# Altium PCB Backlight_V3.PcbDoc
Units mm, origin at the board's own origin, x right, y up, seen from the top; angles counter-clockwise.
Board outline 175 x 175 mm, 2 copper layers (Top Layer, Bottom Layer); 98 components, 59 nets, 200 pads, 33 vias.
Unrouted connection lines stored in the file: 1.
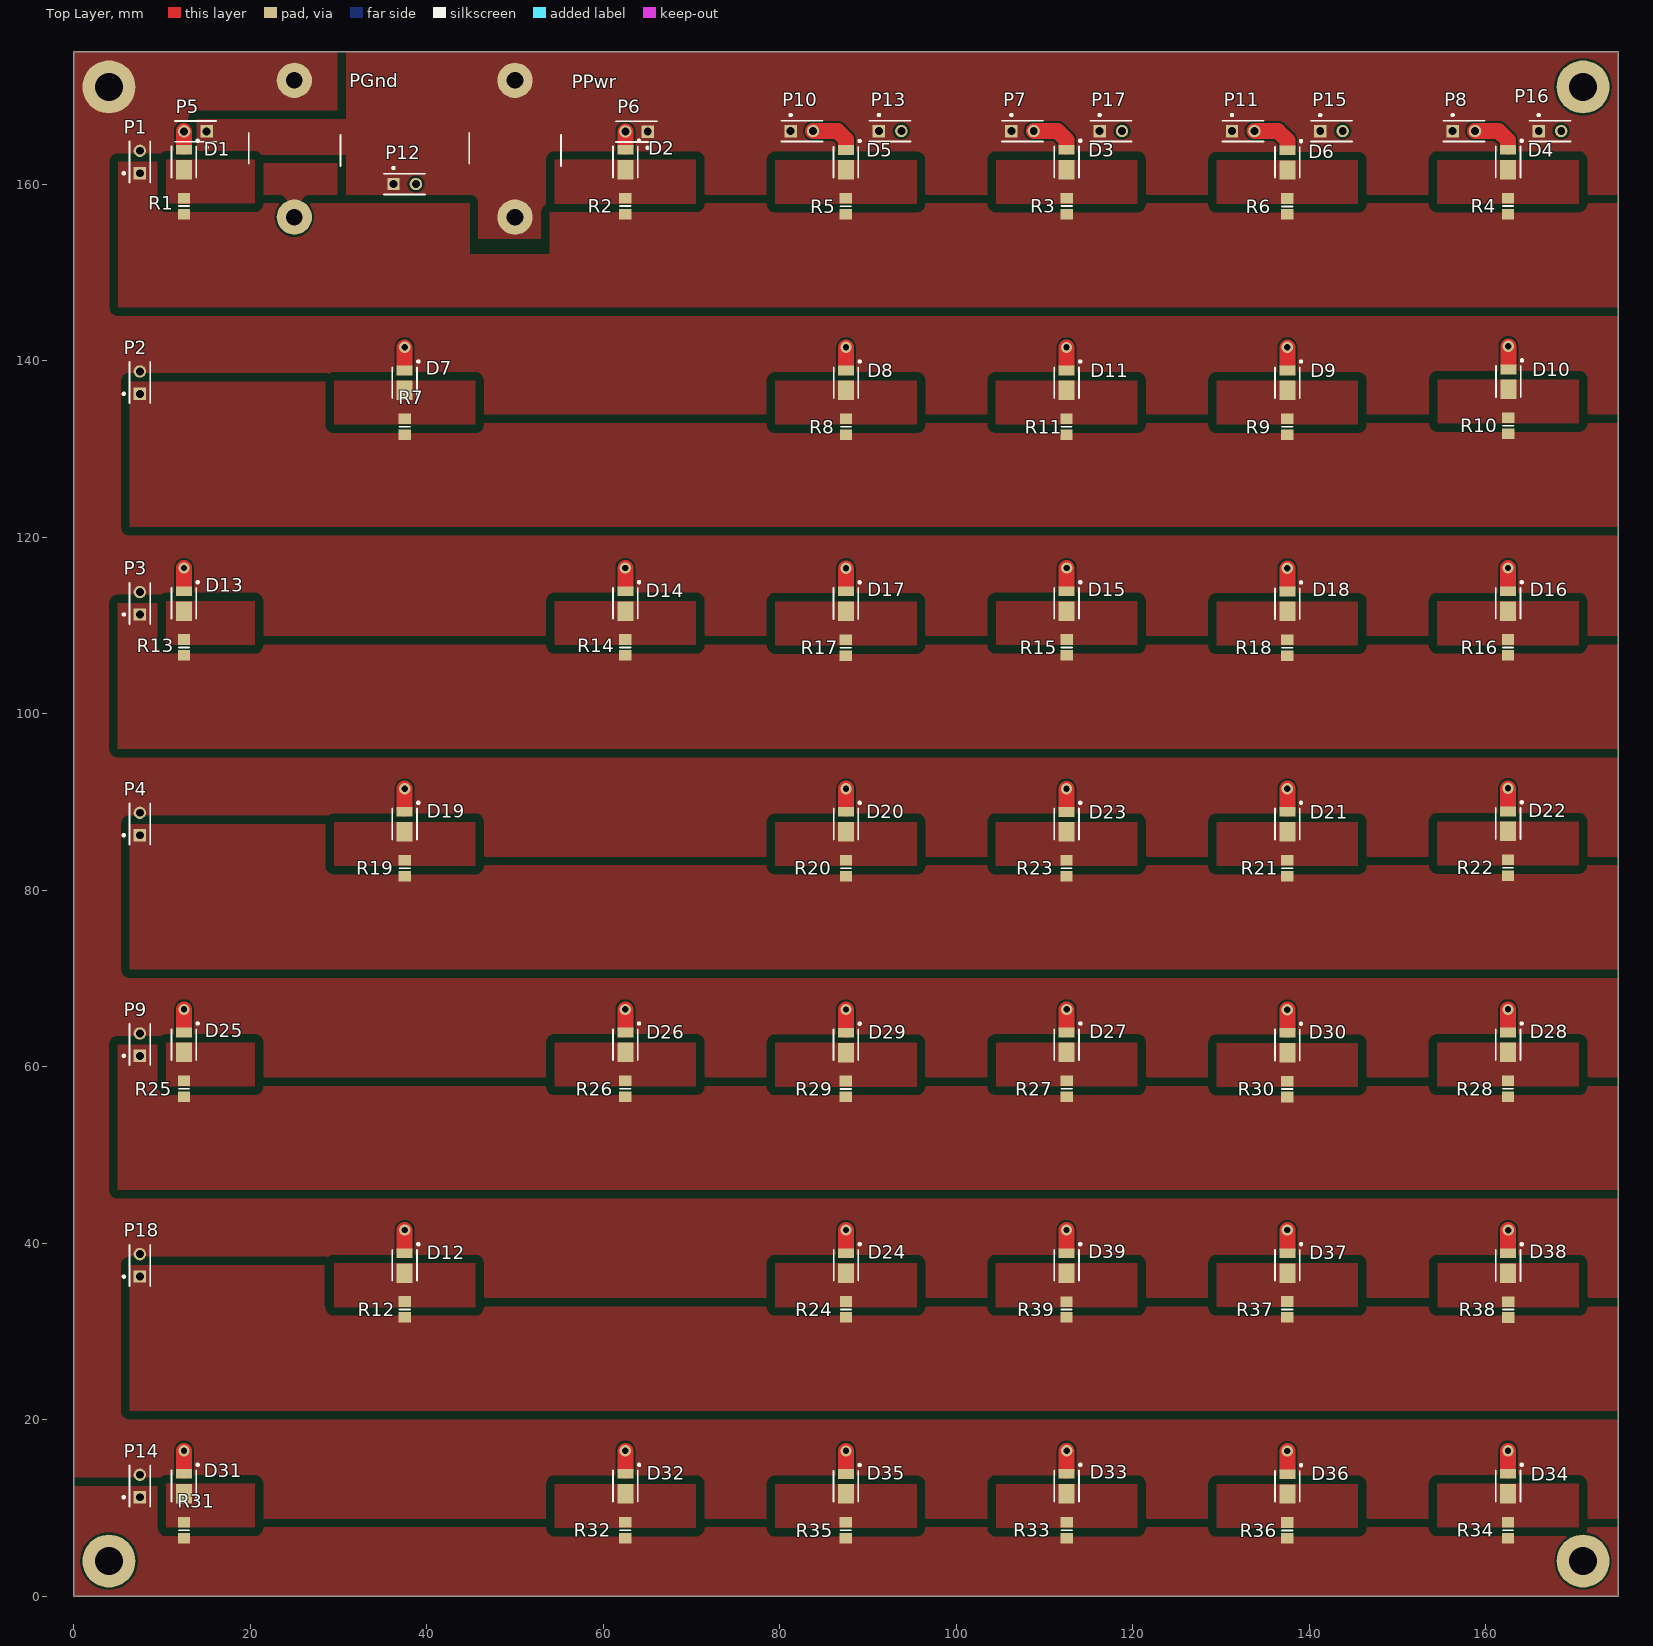
[diagram p0: Top Layer view]
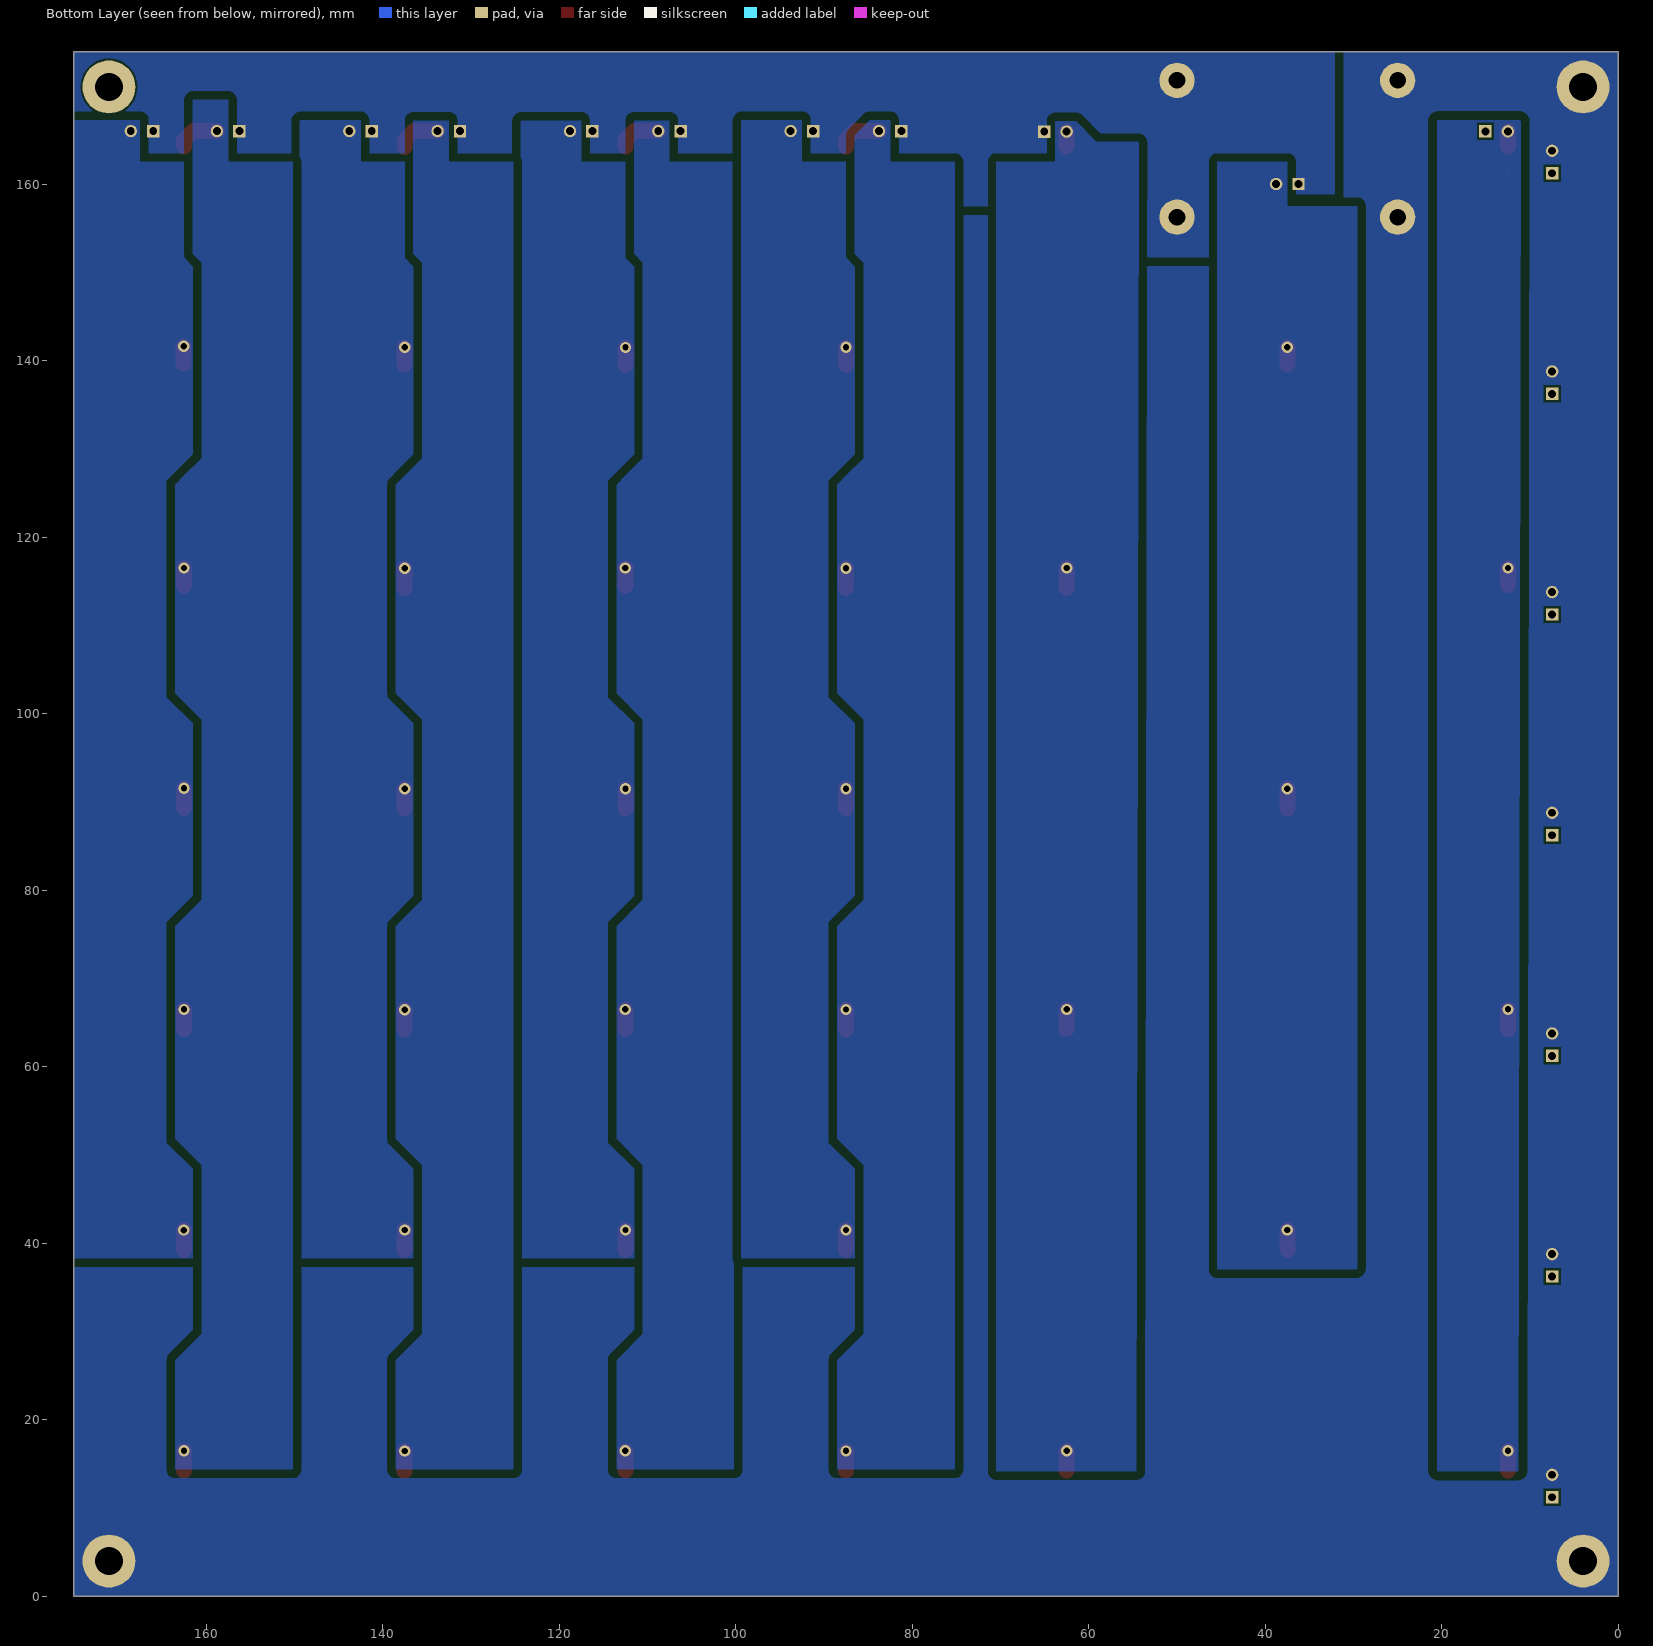
[diagram p1: Bottom Layer view, seen from below]
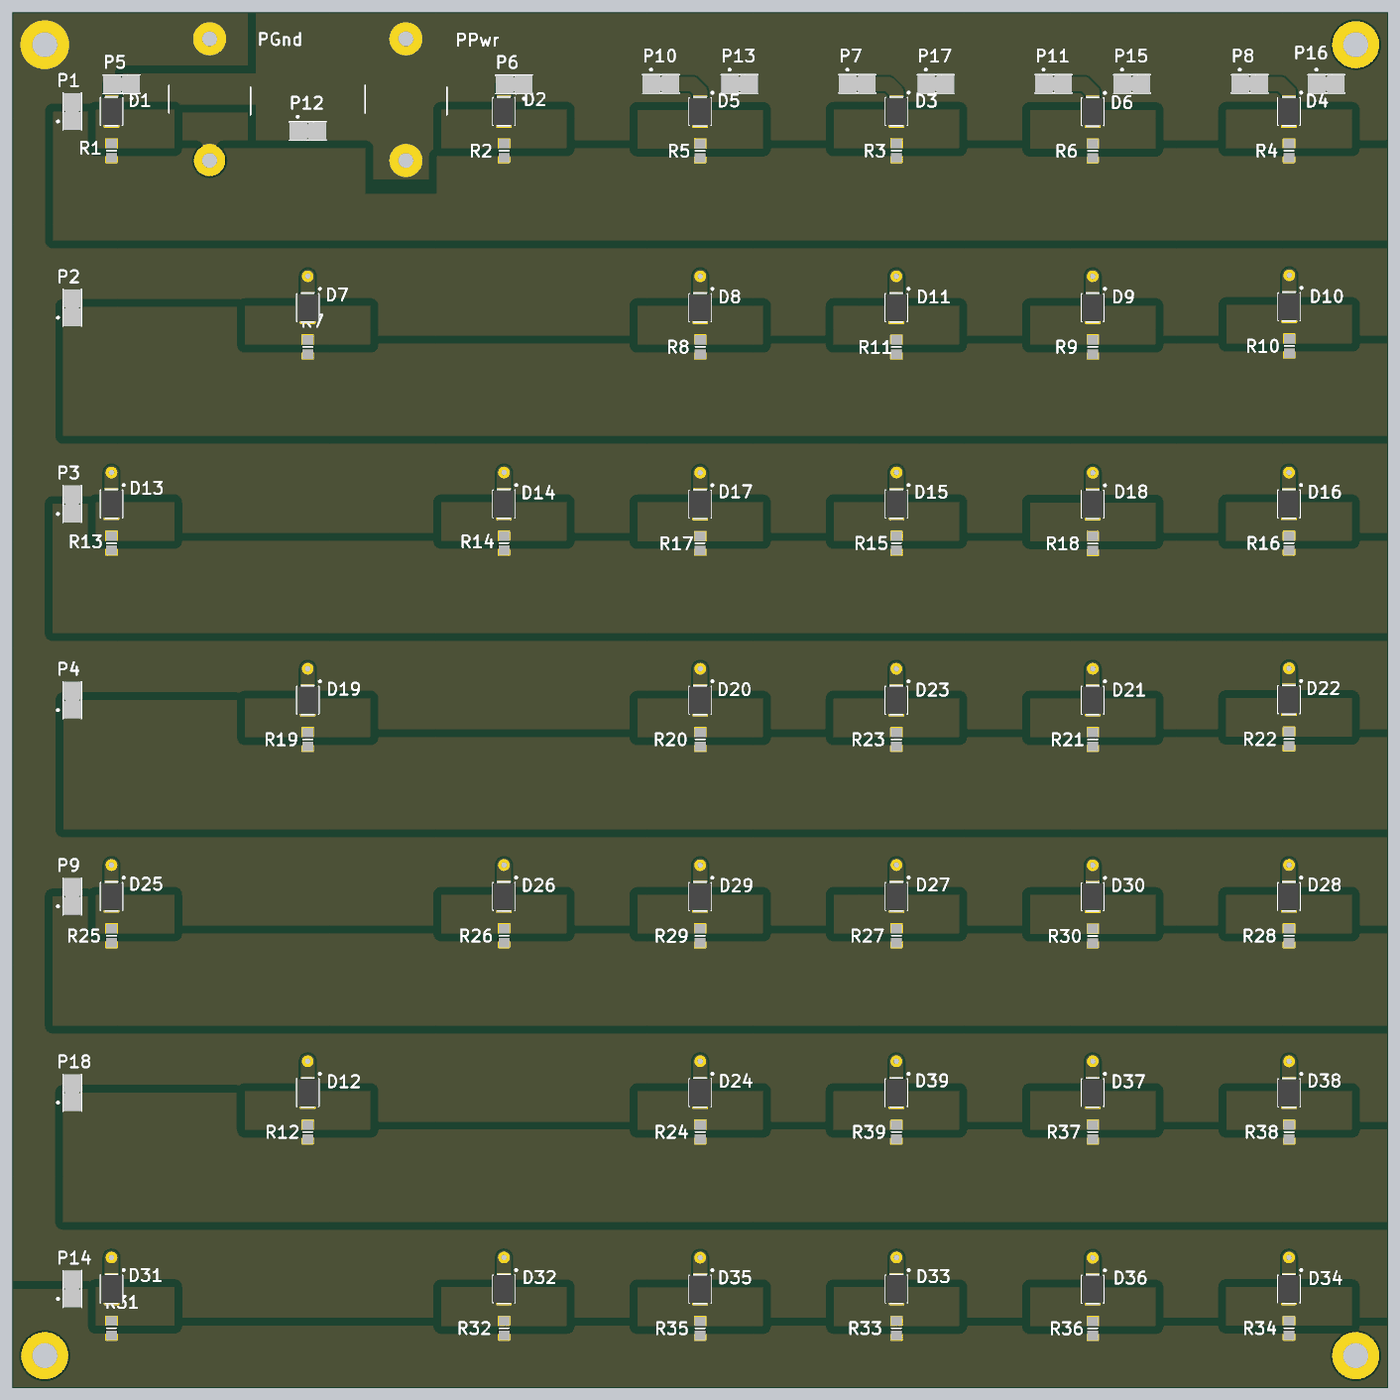
[diagram p2: 3D render of the assembled board from above, using the file's embedded part models]

## Layer stack, top to bottom
Top Solder: solder mask 0.0102, Solder Resist, Dk 3.5
Top Layer: signal copper 0.0356
Dielectric 1: dielectric 0.32, FR-4, Dk 4.8
Bottom Layer: signal copper 0.0356
Bottom Solder: solder mask 0.0102, Solder Resist, Dk 3.5

## Board outline
0,0 0,175 175,175 175,0

## Design rules (kind name [scope] priority, off if disabled: settings)
Clearance [All] p1: gap=0.254 ignorepadtopadclearanceinfootprint=FALSE except(0: Arc-Hole Track-Hole SMDPad-Hole THPad-Hole Via-Hole Fill-Hole Poly-Hole Region-Hole Text-Hole; 1: Fill-Fill Fill-Poly Fill-Region Poly-Poly Poly-Region Region-Region)
PolygonConnect [All] p1: connectstyle=Direct reliefconductorwidth=0.254 reliefentries=4 polygonreliefangle="90 Angle" airgapwidth=0.254
RoomDefinition Backlight_V2 [InComponentClass('Backlight_V2')] p1: confinementstyle=ConfineIn formatcopy=TRUE lockcomponents=FALSE outline 0,0 175,0 175,177.979 0,177.979
RoutingVias [All] p1: holewidth=0.711 width=1.27 viastyle="Through Hole" minholewidth=0.711 minwidth=1.27 maxholewidth=0.711 maxwidth=1.27
SolderMaskExpansion [All] p1: expansion=0.102 istentingtop=FALSE
Width [All] p1: maxlimit=10 minlimit=0.1 preferedwidth=1.8
30 further rules are at their usual default settings.

## Components (designator, comment, footprint, x,y, rotation, side; value= is the part's Value field where it differs from the comment)
D1 "LED0" DIOM3528X07N 12.5,162.5 r270 top
D2 "LED0" DIOM3528X07N 62.5,162.5 r270 top
D3 "LED0" DIOM3528X07N 112.5,162.5 r270 top
D4 "LED0" DIOM3528X07N 162.5,162.5 r270 top
D5 "LED0" DIOM3528X07N 87.491,162.479 r270 top
D6 "LED0" DIOM3528X07N 137.499,162.466 r270 top
D7 "LED0" DIOM3528X07N 37.5,137.5 r270 top
D8 "LED0" DIOM3528X07N 87.5,137.5 r270 top
D9 "LED0" DIOM3528X07N 137.5,137.5 r270 top
D10 "LED0" DIOM3528X07N 162.534,137.627 r270 top
D11 "LED0" DIOM3528X07N 112.484,137.496 r270 top
D12 "LED0" DIOM3528X07N 37.5,37.5 r270 top
D13 "LED0" DIOM3528X07N 12.5,112.5 r270 top
D14 "LED0" DIOM3528X07N 62.5,112.5 r270 top
D15 "LED0" DIOM3528X07N 112.5,112.5 r270 top
D16 "LED0" DIOM3528X07N 162.5,112.5 r270 top
D17 "LED0" DIOM3528X07N 87.491,112.479 r270 top
D18 "LED0" DIOM3528X07N 137.499,112.466 r270 top
D19 "LED0" DIOM3528X07N 37.5,87.5 r270 top
D20 "LED0" DIOM3528X07N 87.5,87.5 r270 top
D21 "LED0" DIOM3528X07N 137.5,87.5 r270 top
D22 "LED0" DIOM3528X07N 162.5,87.551 r270 top
D23 "LED0" DIOM3528X07N 112.484,87.496 r270 top
D24 "LED0" DIOM3528X07N 87.5,37.5 r270 top
D25 "LED0" DIOM3528X07N 12.5,62.5 r270 top
D26 "LED0" DIOM3528X07N 62.5,62.5 r270 top
D27 "LED0" DIOM3528X07N 112.5,62.5 r270 top
D28 "LED0" DIOM3528X07N 162.5,62.5 r270 top
D29 "LED0" DIOM3528X07N 87.491,62.479 r270 top
D30 "LED0" DIOM3528X07N 137.499,62.466 r270 top
D31 "LED0" DIOM3528X07N 12.5,12.5 r270 top
D32 "LED0" DIOM3528X07N 62.5,12.5 r270 top
D33 "LED0" DIOM3528X07N 112.5,12.5 r270 top
D34 "LED0" DIOM3528X07N 162.5,12.5 r270 top
D35 "LED0" DIOM3528X07N 87.491,12.479 r270 top
D36 "LED0" DIOM3528X07N 137.499,12.466 r270 top
D37 "LED0" DIOM3528X07N 137.5,37.5 r270 top
D38 "LED0" DIOM3528X07N 162.516,37.49 r270 top
D39 "LED0" DIOM3528X07N 112.484,37.496 r270 top
P1 "5-146280-2" TECO-5-146280-2_V 7.5,162.5 r90 top
P2 "5-146280-2" TECO-5-146280-2_V 7.5,137.5 r90 top
P3 "5-146280-2" TECO-5-146280-2_V 7.5,112.5 r90 top
P4 "5-146280-2" TECO-5-146280-2_V 7.5,87.5 r90 top
P5 "5-146280-2" TECO-5-146280-2_V 13.789,165.973 r180 top
P6 "5-146280-2" TECO-5-146280-2_V 63.77,165.943 r180 top
P7 "5-146280-2" TECO-5-146280-2_V 107.5,166 r0 top
P8 "5-146280-2" TECO-5-146280-2_V 157.5,166 r0 top
P9 "5-146280-2" TECO-5-146280-2_V 7.5,62.5 r90 top
P10 "5-146280-2" TECO-5-146280-2_V 82.5,166 r0 top
P11 "5-146280-2" TECO-5-146280-2_V 132.5,166 r0 top
P12 "5-146280-2" TECO-5-146280-2_V 37.5,160 r0 top
P13 "5-146280-2" TECO-5-146280-2_V 92.5,166 r0 top
P14 "5-146280-2" TECO-5-146280-2_V 7.5,12.5 r90 top
P15 "5-146280-2" TECO-5-146280-2_V 142.5,166 r0 top
P16 "5-146280-2" TECO-5-146280-2_V 167.254,166 r0 top
P17 "5-146280-2" TECO-5-146280-2_V 117.5,166 r0 top
P18 "5-146280-2" TECO-5-146280-2_V 7.5,37.5 r90 top
PGnd "Plug" Bananenbuchse 25,164 r90 top
PPwr "Plug" Bananenbuchse 50,164 r90 top
R1 "Res2" 6-0805_N 12.5,157.5 r90 top value=100
R2 "Res2" 6-0805_N 62.5,157.5 r90 top value=100
R3 "Res2" 6-0805_N 112.5,157.5 r90 top value=100
R4 "Res2" 6-0805_N 162.5,157.5 r90 top value=100
R5 "Res2" 6-0805_N 87.491,157.479 r90 top value=100
R6 "Res2" 6-0805_N 137.499,157.466 r90 top value=100
R7 "Res2" 6-0805_N 37.5,132.5 r90 top value=100
R8 "Res2" 6-0805_N 87.5,132.5 r90 top value=100
R9 "Res2" 6-0805_N 137.5,132.5 r90 top value=100
R10 "Res2" 6-0805_N 162.534,132.627 r90 top value=100
R11 "Res2" 6-0805_N 112.484,132.496 r90 top value=100
R12 "Res2" 6-0805_N 37.5,32.5 r90 top value=100
R13 "Res2" 6-0805_N 12.5,107.5 r90 top value=100
R14 "Res2" 6-0805_N 62.5,107.5 r90 top value=100
R15 "Res2" 6-0805_N 112.5,107.5 r90 top value=100
R16 "Res2" 6-0805_N 162.5,107.5 r90 top value=100
R17 "Res2" 6-0805_N 87.491,107.479 r90 top value=100
R18 "Res2" 6-0805_N 137.499,107.466 r90 top value=100
R19 "Res2" 6-0805_N 37.5,82.5 r90 top value=100
R20 "Res2" 6-0805_N 87.5,82.5 r90 top value=100
R21 "Res2" 6-0805_N 137.5,82.5 r90 top value=100
R22 "Res2" 6-0805_N 162.5,82.551 r90 top value=100
R23 "Res2" 6-0805_N 112.484,82.496 r90 top value=100
R24 "Res2" 6-0805_N 87.5,32.5 r90 top value=100
R25 "Res2" 6-0805_N 12.5,57.5 r90 top value=100
R26 "Res2" 6-0805_N 62.5,57.5 r90 top value=100
R27 "Res2" 6-0805_N 112.5,57.5 r90 top value=100
R28 "Res2" 6-0805_N 162.5,57.5 r90 top value=100
R29 "Res2" 6-0805_N 87.491,57.479 r90 top value=100
R30 "Res2" 6-0805_N 137.499,57.466 r90 top value=100
R31 "Res2" 6-0805_N 12.5,7.5 r90 top value=100
R32 "Res2" 6-0805_N 62.5,7.5 r90 top value=100
R33 "Res2" 6-0805_N 112.5,7.5 r90 top value=100
R34 "Res2" 6-0805_N 162.5,7.5 r90 top value=100
R35 "Res2" 6-0805_N 87.491,7.479 r90 top value=100
R36 "Res2" 6-0805_N 137.499,7.466 r90 top value=100
R37 "Res2" 6-0805_N 137.5,32.5 r90 top value=100
R38 "Res2" 6-0805_N 162.516,32.49 r90 top value=100
R39 "Res2" 6-0805_N 112.484,32.496 r90 top value=100

## Footprints (in the part's own frame and the unit in brackets; to place one, negate y for a bottom-side part, rotate by r counter-clockwise, add the part's x,y. Pads: shape width x height; smd on the part's side, far side on the other; paste and mask are expansions set on the pad)
6-0805_N [mm] "Chip Resistor, Body 2.0x1.2mm, IPC Medium Density"
  rect 1.2x1.4 smd: 1(-0.9,0) 2(0.9,0)
  silkscreen extent 0,-0.6 0,0.6, body extent -1.07,-0.7 1.07,0.7, height 0.7
Bananenbuchse [mm]
  round 4 hole 1.9: 1(-7.75,0) 1(7.75,0)
  silkscreen extent -1.95,-5.23 1.83,5.18, body extent -11.4,-5.42 12.62,5.42, height 12.6
DIOM3528X07N [mm] "Molded Diode, 2-Leads, Body 3.50x2.80mm, IPC Medium Density"
  rect 1.1x1.8 smd: 1(-1.375,0)
  rect 2.2x1.8 smd: 2(0.875,0)
  silkscreen extent -2.52,-1.4 1.75,1.68, body extent -1.97,-1.4 1.97,1.4, height 0.7
TECO-5-146280-2_V [mm] "Connector, 2-Leads, Body 4.67x2.34mm, Pitch 2.54mm"
  rect 1.4x1.4 hole 0.89: 1(-1.27,0)
  round 1.4 hole 0.89: 2(1.27,0)
  silkscreen extent -2.33,-1.17 2.33,1.94, body extent -2.34,-1.17 2.34,1.17, height 5.33

## Part data
D1 D2 D3 D4 D5 D6 D7 D8 D9 D10 D11 D12 D13 D14 D15 D16 D17 D18 D19 D20 D21 D22 D23 D24 D25 D26 D27 D28 D29 D30 D31 D32 D33 D34 D35 D36 D37 D38 D39: "Typical INFRARED GaAs LED", LatestRevisionDate=08-Jul-2005, LatestRevisionNote="Mech Layer 1 removed.", PackageDescription="LED; 2 Leads", PackageReference=LED-0, Published=8-Jun-2000, Publisher="Altium Limited"
P1 P2 P3 P4 P5 P6 P7 P8 P9 P10 P11 P12 P13 P14 P15 P16 P17 P18: library part CMP-2000-07492-1, "Male Header, Pitch 2.54 mm, 1 x 2 Position, Height 8.21 mm, Tail Length 3.05 mm, -65 to 105 degC, RoHS, Bulk", Case\/Package=100, Colour=Black, Current Rating=3A, Flammability Rating=UL94V-0, High Temperature Housing=Yes, Manufacturer="TE Connectivity", Max Current Rating=5A, Max Operating Temperature=105degC, Min Operating Temperature=-65degC, Package Description="Male Header, Pitch 2.54 mm, 1 x 2 Position, Height 8.21 mm, Tail Length 3.05 mm", Package Quantity=500, Approvals=CSA, Board Standoff=No(Without), Connector Type=Header, Contact Gender=Male, Contact Material=CopperAlloy, Contact Mating Length=0.23inch, Contact Plating=Matte, Contact Protection=No(Without), Contact Shape=Square, Datasheet URL=http://www.te.com/commerce/DocumentDelivery/DDEController?Action=showdoc&DocId=Customer+Drawing%7F146280%7FH1%7Fpdf%7FEnglish%7FENG_CD_146280_H1.pdf%7F5-146280-2, Datasheet Version="Rev. H1, 08/2016", Depth=2.34mm, Gasket=No(Without), High Speed Serial Data Connector=No, Housing Colour=Black, Housing Material=Polymer, Keyed=No, Length=4.67mm, Manufacturer URL=http://www.te.com/, Mating Alignment=No(Without), Mating Connector Lock=No(Without), Mating Post Length=0.23inch, Mount=ThroughHole, Mounting Technology=ThroughHole, Number of Contacts=2, Number of Positions=2, Number of Rows=1, Orientation=Straight, Package Reference=5-146280-2, Packaging=Carton, Panel Mount Retention=No(Without), PCB Mount Retention=Without, PCB Mounting Orientation=Vertical, PCB Thickness=0.063inch, Pitch=2.54mm, Radiation Hardening=No, RoHSCompliant=true, Row Spacing=2.54mm, Selectively Loaded=No(Without), Stabilizers=No(Without), Termination=ThroughHole, Termination Post Length=0.12inch
R1 R2 R3 R4 R5 R6 R7 R8 R9 R10 R11 R12 R13 R14 R15 R16 R17 R18 R19 R20 R21 R22 R23 R24 R25 R26 R27 R28 R29 R30 R31 R32 R33 R34 R35 R36 R37 R38 R39: "Resistor", LatestRevisionDate=17-Jul-2002, LatestRevisionNote="Re-released for DXP Platform.", PackageDescription="Axial Device, Thru-Hole; 2 Leads; 0.4 in Pin Spacing", PackageReference=AXIAL-0.4, Published=8-Jun-2000, Publisher="Altium Limited"
PGnd PPwr: LatestRevisionDate=17-Jul-2002, LatestRevisionNote="Re-released for DXP Platform.", Publisher="Altium Limited"

## Free pads (board coordinates)
  round 6 hole 3.2: 1(4,4) 1(4,171) 1(171,4) 1(171,171)

## Via types
v1: diameter 1.27, hole 0.711, Top Layer to Bottom Layer, 33 vias

## Nets (pads, with @x,y where several pads share a name; then routed paths per layer and width w, separated by ;. In a path a pad name is that pad's centre, name@x,y a point inside that pad or via, vN(x,y) a via of type N, cw(c..) or ccw(c..) an arc to the next point about the centre after c; other vN are vias at no path point)
GND: P1.2 P2.2 P3.2 P4.2 P9.2 P14.2 P18.2 pad.1 PGnd.1
Hex1: D7.1 D12.1 D19.1 P12.2 | length 6.5
  Top Layer w1.8: D12.1@37.5,39.25 v1(37.5,41.5) ; D19.1@37.5,89.25 v1(37.5,91.5) ; 37.5,139.527 v1(37.5,141.5)
Hex2: D8.1 D20.1 D24.1 P13.2 | length 6.5
  Top Layer w1.8: D24.1@87.5,39.25 v1(87.5,41.5) ; D20.1@87.5,89.25 v1(87.5,91.5) ; 87.5,139.516 v1(87.5,141.5)
Hex3: D9.1 D21.1 D37.1 P15.2 | length 6.5
  Top Layer w1.8: D37.1@137.5,39.25 v1(137.5,41.5) ; D21.1@137.5,89.25 v1(137.5,91.5) ; 137.5,139.535 v1(137.5,141.5)
Hex4: D10.1 D22.1 D38.1 P16.2 | length 6.5
  Top Layer w1.8: D22.1@162.5,89.301 v1(162.5,91.551) ; D38.1@162.516,39.24 v1(162.516,41.49) ; 162.534,139.623 v1(162.534,141.627)
Hex5: D11.1 D23.1 D39.1 P17.2 | length 6.5
  Top Layer w1.8: D39.1@112.484,39.246 v1(112.484,41.496) ; D23.1@112.484,89.246 v1(112.484,91.496) ; 112.484,139.512 v1(112.484,141.496)
NetD1_2: D1.2 R1.2 | length 0
NetD2_2: D2.2 R2.2
NetD3_2: D3.2 R3.2
NetD4_2: D4.2 R4.2
NetD5_2: D5.2 R5.2
NetD6_2: D6.2 R6.2
NetD7_2: D7.2 R7.2
NetD8_2: D8.2 R8.2
NetD9_2: D9.2 R9.2
NetD10_2: D10.2 R10.2
NetD11_2: D11.2 R11.2
NetD12_2: D12.2 R12.2
NetD13_2: D13.2 R13.2
NetD14_2: D14.2 R14.2
NetD15_2: D15.2 R15.2
NetD16_2: D16.2 R16.2
NetD17_2: D17.2 R17.2
NetD18_2: D18.2 R18.2
NetD19_2: D19.2 R19.2
NetD20_2: D20.2 R20.2
NetD21_2: D21.2 R21.2
NetD22_2: D22.2 R22.2
NetD23_2: D23.2 R23.2
NetD24_2: D24.2 R24.2
NetD25_2: D25.2 R25.2
NetD26_2: D26.2 R26.2
NetD27_2: D27.2 R27.2
NetD28_2: D28.2 R28.2
NetD29_2: D29.2 R29.2
NetD30_2: D30.2 R30.2
NetD31_2: D31.2 R31.2
NetD32_2: D32.2 R32.2
NetD33_2: D33.2 R33.2
NetD34_2: D34.2 R34.2
NetD35_2: D35.2 R35.2
NetD36_2: D36.2 R36.2
NetD37_2: D37.2 R37.2
NetD38_2: D38.2 R38.2
NetD39_2: D39.2 R39.2
NetP1_1: P1.1 R1.1 R2.1 R3.1 R4.1 R5.1 R6.1
NetP2_1: P2.1 R7.1 R8.1 R9.1 R10.1 R11.1
NetP3_1: P3.1 R13.1 R14.1 R15.1 R16.1 R17.1 R18.1
NetP4_1: P4.1 R19.1 R20.1 R21.1 R22.1 R23.1
NetP9_1: P9.1 R25.1 R26.1 R27.1 R28.1 R29.1 R30.1
NetP14_1: P14.1 R31.1 R32.1 R33.1 R34.1 R35.1 R36.1
NetP18_1: P18.1 R12.1 R24.1 R37.1 R38.1 R39.1
Sqr1: D1.1 D13.1 D25.1 D31.1 P5.2 | length 8.2
  Top Layer w1.8: P5.2@12.478,165.995 12.5,165.973 D1.1@12.5,164.25 ; D31.1@12.5,14.25 v1(12.5,16.5) ; D25.1@12.5,64.25 v1(12.5,66.5) ; 12.5,114.583 v1(12.5,116.5)
Sqr2: D2.1 D14.1 D26.1 D32.1 P6.2 | length 8.4
  Top Layer w1.8: D32.1@62.5,14.25 v1(62.5,16.5) ; D26.1@62.5,64.25 v1(62.5,66.5) ; D14.1@62.5,114.25 v1(62.5,116.5) ; D2.1@62.5,164.25 P6.2
Sqr3: D3.1 D15.1 D27.1 D33.1 P7.2 | length 11.4
  Top Layer w1.8: P7.2 111.482,166 112.5,164.982 D3.1@112.5,164.25 ; D33.1@112.5,14.25 v1(112.5,16.5) ; D27.1@112.5,64.25 v1(112.5,66.5) ; 112.5,114.465 v1(112.5,116.5)
Sqr4: D4.1 D16.1 D28.1 D34.1 P8.2 | length 11.4
  Top Layer w1.8: P8.2 161.446,166 162.5,164.946 D4.1@162.5,164.25 ; D34.1@162.5,14.25 v1(162.5,16.5) ; D28.1@162.5,64.25 v1(162.5,66.5) ; 162.5,114.503 v1(162.5,116.5)
Sqr5: D5.1 D17.1 D29.1 D35.1 P10.2 | length 11.7
  Top Layer w1.8: P10.2 86.551,166 87.491,165.06 D5.1@87.491,164.229 ; D35.1@87.491,14.229 v1(87.491,16.479) ; D29.1@87.491,64.229 v1(87.491,66.479) ; D17.1@87.491,114.229 v1(87.491,116.479)
Sqr6: D6.1 D18.1 D30.1 D36.1 P11.2 | length 11.6
  Top Layer w1.8: P11.2 136.444,166 137.499,164.946 D6.1@137.499,164.216 ; D36.1@137.499,14.216 v1(137.499,16.466) ; D30.1@137.499,64.216 v1(137.499,66.466) ; D18.1@137.499,114.216 v1(137.499,116.466)
VCC: P5.1 P6.1 P7.1 P8.1 P10.1 P11.1 P12.1 P13.1 P15.1 P16.1 P17.1 PPwr.1

## Polygon pours and split planes (outlines as drawn)
GND on Top Layer "GND_L01_P081" (solid, pour order 81): 17.635,4.631
GND on Top Layer "GND_L01_P080" (solid, pour order 80): 0,175 175,175 175,0 0,0
VCC on Top Layer "VCC_L01_P050" (solid, pour order 50): 30.885,163.346 30.885,153.812 47.444,153.812 175,153.812 175,175 30.885,175 30.885,167.357 13.943,167.357 13.943,163.346
NetP14_1 on Top Layer "NETP14_1_L01_P040" (solid, pour order 40): 0,12.5 10.5,12.5 10.5,7.804 175,7.804 175,0 0,0
NetP4_1 on Top Layer "NETP4_1_L01_P043" (solid, pour order 43): 6.36,87.5 28.504,87.5 28.504,82.804 175,82.804 175,71.042 6.36,71.042
no net on Top Layer "NONET_L01_P047" (solid, pour order 47): 3.491,12.5
NetP1_1 on Top Layer "NETP1_1_L01_P046" (solid, pour order 46): 44.852,157.804 44.852,152.02 53.95,152.02 53.95,157.804 175,157.804 175,146.042 5.039,146.042 5.039,162.5 10.539,162.5 10.539,157.804
NetP2_1 on Top Layer "NETP2_1_L01_P045" (solid, pour order 45): 6.349,137.623 29.5,137.623 29.5,132.926 175,132.926 175,121.164 6.349,121.164
NetP3_1 on Top Layer "NETP3_1_L01_P044" (solid, pour order 44): 5,112.5 10.5,112.5 10.5,107.804 175,107.804 175,96.042 5,96.042
NetP9_1 on Top Layer "NETP9_1_L01_P042" (solid, pour order 42): 5,62.5 10.5,62.5 10.5,57.804 175,57.804 175,46.042 5,46.042
NetP18_1 on Top Layer "NETP18_1_L01_P041" (solid, pour order 41): 6.332,37.5 28.393,37.5 28.393,32.804 175,32.804 175,21.042 6.332,21.042
NetD31_2 on Top Layer "NETD31_2_L01_P039" (solid, pour order 39): 10.5,7.804 20.5,7.804 20.5,12.739 10.5,12.739
NetD32_2 on Top Layer "NETD32_2_L01_P038" (solid, pour order 38): 54.5,7.785 70.5,7.785 70.5,12.72 54.5,12.72
NetD33_2 on Top Layer "NETD33_2_L01_P037" (solid, pour order 37): 104.5,7.785 120.5,7.785 120.5,12.72 104.5,12.72
NetD34_2 on Top Layer "NETD34_2_L01_P036" (solid, pour order 36): 154.5,7.804 170.5,7.804 170.5,12.739 154.5,12.739
NetD35_2 on Top Layer "NETD35_2_L01_P035" (solid, pour order 35): 79.491,7.764 95.491,7.764 95.491,12.7 79.491,12.7
NetD36_2 on Top Layer "NETD36_2_L01_P034" (solid, pour order 34): 129.499,7.751 145.499,7.751 145.499,12.687 129.499,12.687
NetD39_2 on Top Layer "NETD39_2_L01_P033" (solid, pour order 33): 104.484,32.777 120.484,32.777 120.484,37.712 104.484,37.712
NetD38_2 on Top Layer "NETD38_2_L01_P032" (solid, pour order 32): 154.516,32.773 170.516,32.773 170.516,37.709 154.516,37.709
NetD37_2 on Top Layer "NETD37_2_L01_P031" (solid, pour order 31): 129.5,32.784 145.5,32.783 145.5,37.719 129.5,37.719
NetD24_2 on Top Layer "NETD24_2_L01_P030" (solid, pour order 30): 79.5,32.775 95.5,32.775 95.5,37.711 79.5,37.711
NetD12_2 on Top Layer "NETD12_2_L01_P029" (solid, pour order 29): 29.5,32.775 45.5,32.775 45.5,37.711 29.5,37.711
NetD25_2 on Top Layer "NETD25_2_L01_P028" (solid, pour order 28): 10.5,57.781 20.5,57.781 20.5,62.716 10.5,62.716
NetD26_2 on Top Layer "NETD26_2_L01_P027" (solid, pour order 27): 54.5,57.781 70.5,57.781 70.5,62.716 54.5,62.716
NetD27_2 on Top Layer "NETD27_2_L01_P026" (solid, pour order 26): 104.5,57.781 120.5,57.781 120.5,62.716 104.5,62.716
NetD28_2 on Top Layer "NETD28_2_L01_P025" (solid, pour order 25): 154.5,57.781 170.5,57.781 170.5,62.716 154.5,62.716
NetD29_2 on Top Layer "NETD29_2_L01_P024" (solid, pour order 24): 79.491,57.76 95.491,57.76 95.491,62.695 79.491,62.695
NetD30_2 on Top Layer "NETD30_2_L01_P023" (solid, pour order 23): 129.499,57.747 145.499,57.747 145.499,62.682 129.499,62.682
NetD23_2 on Top Layer "NETD23_2_L01_P022" (solid, pour order 22): 104.484,82.781 120.484,82.781 120.484,87.716 104.484,87.716
NetD22_2 on Top Layer "NETD22_2_L01_P021" (solid, pour order 21): 154.5,82.835 170.5,82.835 170.5,87.77 154.5,87.77
NetD21_2 on Top Layer "NETD21_2_L01_P020" (solid, pour order 20): 129.5,82.772 145.5,82.772 145.5,87.708 129.5,87.708
NetD20_2 on Top Layer "NETD20_2_L01_P019" (solid, pour order 19): 79.5,82.772 95.5,82.772 95.5,87.708 79.5,87.708
NetD19_2 on Top Layer "NETD19_2_L01_P018" (solid, pour order 18): 29.5,82.775 45.5,82.775 45.5,87.711 29.5,87.711
NetD13_2 on Top Layer "NETD13_2_L01_P017" (solid, pour order 17): 10.5,107.783 20.5,107.783 20.5,112.719 10.5,112.719
NetD14_2 on Top Layer "NETD14_2_L01_P016" (solid, pour order 16): 54.5,107.784 70.5,107.783 70.5,112.719 54.5,112.719
NetD15_2 on Top Layer "NETD15_2_L01_P015" (solid, pour order 15): 104.5,107.784 120.5,107.783 120.5,112.719 104.5,112.719
NetD16_2 on Top Layer "NETD16_2_L01_P014" (solid, pour order 14): 154.5,107.775 170.5,107.775 170.5,112.71 154.5,112.71
NetD17_2 on Top Layer "NETD17_2_L01_P013" (solid, pour order 13): 79.491,107.763 95.491,107.763 95.491,112.698 79.491,112.698
NetD18_2 on Top Layer "NETD18_2_L01_P012" (solid, pour order 12): 129.499,107.741 145.499,107.741 145.499,112.676 129.499,112.676
NetD11_2 on Top Layer "NETD11_2_L01_P011" (solid, pour order 11): 104.484,132.784 120.484,132.784 120.484,137.719 104.484,137.719
NetD10_2 on Top Layer "NETD10_2_L01_P010" (solid, pour order 10): 154.534,132.908 170.534,132.908 170.534,137.843 154.534,137.843
NetD9_2 on Top Layer "NETD9_2_L01_P009" (solid, pour order 9): 129.5,132.783 145.5,132.783 145.5,137.718 129.5,137.718
NetD8_2 on Top Layer "NETD8_2_L01_P008" (solid, pour order 8): 79.5,132.778 95.5,132.778 95.5,137.713 79.5,137.713
NetD7_2 on Top Layer "NETD7_2_L01_P007" (solid, pour order 7): 29.5,132.774 45.5,132.774 45.5,137.71 29.5,137.71
NetD6_2 on Top Layer "NETD6_2_L01_P006" (solid, pour order 6): 129.499,157.743 145.499,157.743 145.499,162.678 129.499,162.678
NetD5_2 on Top Layer "NETD5_2_L01_P005" (solid, pour order 5): 79.491,157.764 95.491,157.764 95.491,162.699 79.491,162.699
NetD4_2 on Top Layer "NETD4_2_L01_P004" (solid, pour order 4): 154.5,157.785 170.5,157.785 170.5,162.72 154.5,162.72
NetD3_2 on Top Layer "NETD3_2_L01_P003" (solid, pour order 3): 104.5,157.781 120.5,157.781 120.5,162.716 104.5,162.716
NetD2_2 on Top Layer "NETD2_2_L01_P002" (solid, pour order 2): 54.5,157.79 70.5,157.79 70.5,162.726 54.5,162.726
NetD1_2 on Top Layer "NETD1_2_L01_P001" (solid, pour order 1): 10.5,157.804 20.5,157.804 20.5,162.74 10.5,162.74
no net on Top Layer "NONET_L01_P000" (solid, pour order 0): 11.815,157.804 11.822,157.798 13.187,157.798
GND on Bottom Layer "GND_L02_P079" (solid, pour order 79): 0,175 175,175 175,0 0,0
VCC on Bottom Layer "VCC_L02_P077" (solid, pour order 77): 37.5,151.717 37.5,158.83 32.104,158.83 32.136,175 32.163,175 44.661,174.997 175,174.987 175,157.5 62.5,157.5 62.5,151.717
Hex4 on Bottom Layer "HEX4_L02_P076" (solid, pour order 76): 167.491,167.237 167.491,162.5 162.491,162.5 162.491,151.632 161.491,150.632 161.491,129.38 164.491,126.38 164.491,101.884 161.491,98.884 161.491,79.374 164.491,76.374 164.491,51.4 161.491,48.4 161.491,38.308 175,38.308 175,167.237
Hex3 on Bottom Layer "HEX3_L02_P075" (solid, pour order 75): 142.491,167.215 142.491,162.5 137.491,162.5 137.491,151.632 136.491,150.632 136.491,129.38 139.491,126.38 139.491,101.884 136.491,98.884 136.491,79.374 139.491,76.374 139.491,51.4 136.491,48.4 136.491,38.308 149.36,38.308 149.36,167.215
Hex5 on Bottom Layer "HEX5_L02_P074" (solid, pour order 74): 117.491,167.17 117.491,162.5 112.491,162.5 112.491,151.632 111.491,150.632 111.491,129.38 114.491,126.38 114.491,101.884 111.491,98.884 111.491,79.374 114.491,76.374 114.491,51.4 111.491,48.4 111.491,38.308 124.36,38.308 124.36,167.17
Sqr4 on Bottom Layer "SQR4_L02_P073" (solid, pour order 73): 162.5,126.96 160.5,128.96 160.5,151.098 161.5,152.098 161.5,169.542 157.5,169.542 157.5,162.5 150.189,162.5 150.189,14.394 163.5,14.394 163.5,26.767 160.5,29.767 160.5,48.843 163.5,51.843 163.5,75.938 160.5,78.938 160.5,99.327 163.5,102.327 163.5,125.96
Sqr6 on Bottom Layer "SQR6_L02_P072" (solid, pour order 72): 137.5,126.96 135.5,128.96 135.5,151.098 136.5,152.098 136.5,167.171 132.5,167.171 132.5,162.5 125.189,162.5 125.189,14.394 138.5,14.394 138.5,26.767 135.5,29.767 135.5,48.843 138.5,51.843 138.5,75.938 135.5,78.938 135.5,99.327 138.5,102.327 138.5,125.96
Sqr3 on Bottom Layer "SQR3_L02_P071" (solid, pour order 71): 112.5,126.96 110.5,128.96 110.5,151.098 111.5,152.098 111.5,167.17 107.5,167.17 107.5,162.5 100.189,162.5 100.189,14.394 113.5,14.394 113.5,26.767 110.5,29.767 110.5,48.843 113.5,51.843 113.5,75.938 110.5,78.938 110.5,99.327 113.5,102.327 113.5,125.96
Hex2 on Bottom Layer "HEX2_L02_P069" (solid, pour order 69): 92.491,167.247 92.491,162.5 87.491,162.5 87.491,151.632 86.491,150.632 86.491,129.38 89.491,126.38 89.491,101.884 86.491,98.884 86.491,79.374 89.491,76.374 89.491,51.4 86.491,48.4 86.491,38.308 99.36,38.308 99.36,167.247
no net on Bottom Layer "NONET_L02_P068" (solid, pour order 68): 86.194,78.954
Sqr5 on Bottom Layer "SQR5_L02_P066" (solid, pour order 66): 84.835,167.237 84.835,167.204 86.5,165.539 86.5,152.098 85.5,151.098 85.5,128.96 87.5,126.96 88.5,125.96 88.5,102.327 85.5,99.327 85.5,78.938 88.5,75.938 88.5,51.843 85.5,48.843 85.5,29.767 88.5,26.767 88.5,14.394 75.189,14.394 75.189,162.5 82.5,162.5 82.5,167.237
Sqr2 on Bottom Layer "SQR2_L02_P059" (solid, pour order 59): 63.77,162.5 63.77,167.113 61.435,167.113 59.077,164.755 59.018,164.773 54.341,164.773 54.598,14.185 70.459,14.185 70.459,162.5
Hex1 on Bottom Layer "HEX1_L02_P054" (solid, pour order 54): 37.5,162.5 37.5,157.5 29.596,157.5 29.59,37.051 45.422,37.051 45.422,162.5
Sqr1 on Bottom Layer "SQR1_L02_P053" (solid, pour order 53): 11.084,167.23 20.507,167.23 20.507,14.185 11.334,14.185

## Silkscreen, mask and mechanical layers (free items; w line width, h text height)
Board:
  the board outline again, w0.254